# Allegro board brd_tilebridge.brd
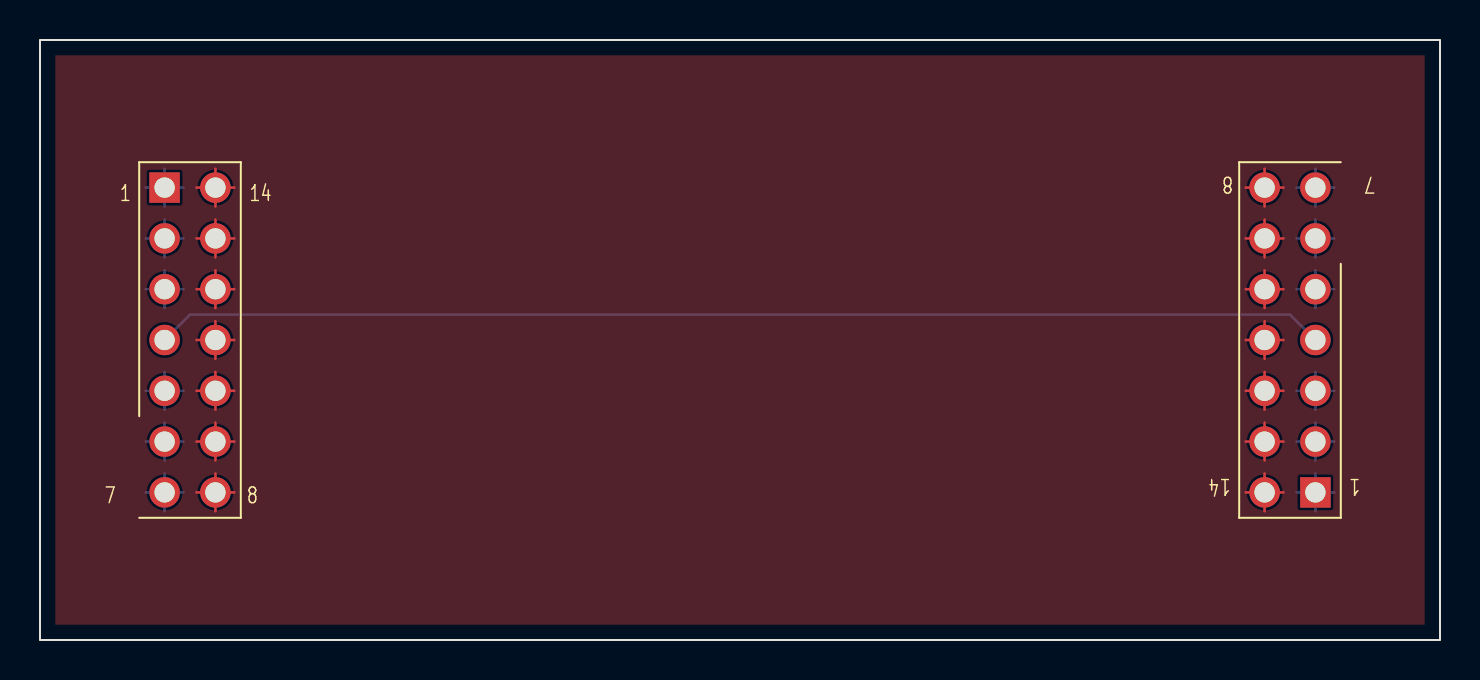
[diagram p0: board, top side]
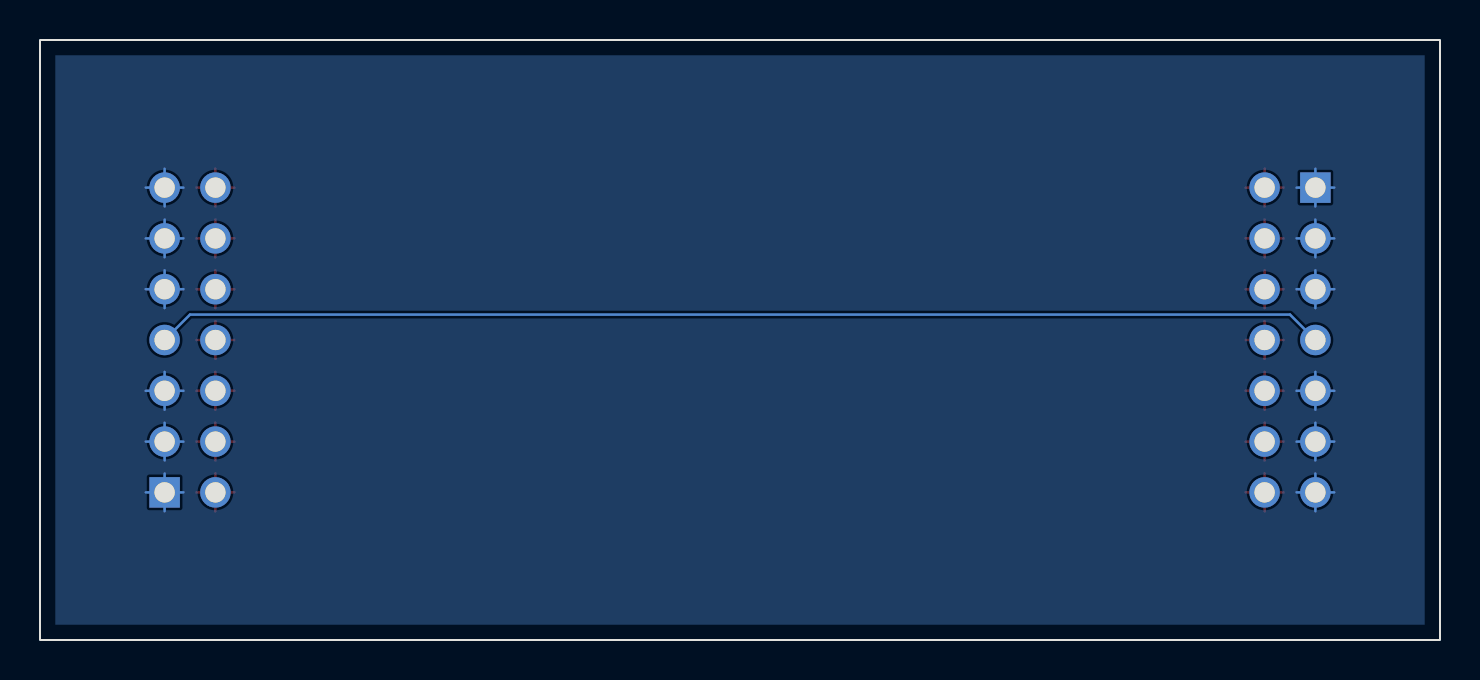
[diagram p1: board, bottom side, seen from below]

Outline 70 x 30 mm; copper layers: TOP, BOTTOM. Coordinates in mm from the lower left corner of the outline.
Outline path: rectangle 0,0 70,30

## Design rules (mm)
constraint set DEFAULT: min track width 0.127

## Placement (name value [footprint] x y rotation side)
J1  conn-generic-2x7  [HDR2X7]  7.5 15 0 top
J2  conn-generic-2x7  [HDR2X7]  62.5 15 180 top

## Library data of the parts
J1 J2 = CONN-GENERIC-2X5_0

## Footprints (pads in the part's own frame, mm; a bottom-side part is the same pattern mirrored in y, then rotated)
HDR2X7
  rect 1.524x1.524 hole 1.016: 1(-1.27,7.62)
  round 1.524 hole 1.016: 2(-1.27,5.08) 3(-1.27,2.54) 4(-1.27,0) 5(-1.27,-2.54) 6(-1.27,-5.08) 7(-1.27,-7.62) 8(1.27,-7.62) 9(1.27,-5.08) 10(1.27,-2.54) 11(1.27,0) 12(1.27,2.54) 13(1.27,5.08) 14(1.27,7.62)

## Nets
GND: J1.1 J1.2 J1.3 J1.5(9) J1.6 J1.7 J2.1 J2.2 J2.3 J2.5(9) J2.6 J2.7
DATA_A: J1.4 J2.4
MAIN_PWR: J1.8 J1.9 J1.10 J1.11 J1.12 J1.13 J1.14 J2.8 J2.9 J2.10 J2.11 J2.12 J2.13 J2.14

## Routing (per net, layer and track width the routed paths; a pad name or vN(x,y) marks a point on that pad's centre or on a via; arc(x,y) is an arc through that point)
GND: length 45.2
  BOTTOM w0.127: J2.1 63.77,8.32 ; J2.1 62.83,7.38 ; J2.1 64.71,7.38 ; J2.1 63.77,6.44 ; J2.6 63.77,21.02 ; J2.6 62.83,20.08 ; J2.6 63.77,19.14 ; J2.6 64.71,20.08 ; 6.23,16.6 J1.3 ; J1.3 5.29,17.54 ; J1.3 7.17,17.54 ; J1.3 6.23,18.48 ; J1.7 7.17,7.38 ; J1.7 6.23,8.32 ; J1.7 5.29,7.38 ; J1.7 6.23,6.44 ; J2.2 64.71,9.92 ; J2.2 63.77,10.86 ; J2.2 63.77,8.98 ; J2.2 62.83,9.92 ; J2.7 64.71,22.62 ; J2.7 63.77,21.68 ; J2.7 62.83,22.62 ; J2.7 63.77,23.56 ; 62.83,17.54 J2.5 ; J2.5 63.77,16.6 ; J2.5 63.77,18.48 ; J2.5 64.71,17.54 ; 6.23,19.14 J1.2 ; J1.2 7.17,20.08 ; J1.2 5.29,20.08 ; J1.2 6.23,21.02 ; 5.29,12.46 J1.5 ; J1.5 6.23,11.52 ; J1.5 7.17,12.46 ; J1.5 6.23,13.4 ; J1.1 7.17,22.62 ; J1.1 5.29,22.62 ; J1.1 6.23,23.56 ; J1.1 6.23,21.68 ; 6.23,8.98 J1.6 ; J1.6 6.23,10.86 ; J1.6 7.17,9.92 ; J1.6 5.29,9.92 ; J2.3 64.71,12.46 ; J2.3 63.77,13.4 ; J2.3 62.83,12.46 ; J2.3 63.77,11.52
DATA_A: length 58.6
  BOTTOM w0.127: J1.4 7.5,16.27 62.5,16.27 J2.4
MAIN_PWR: length 52.8
  TOP w0.127: J2.8 62.17,22.62 ; J2.8 61.23,21.68 ; J2.8 61.23,23.56 ; J2.8 60.29,22.62 ; 8.77,11.52 J1.10 ; J1.10 9.71,12.46 ; J1.10 8.77,13.4 ; J1.10 7.83,12.46 ; 7.83,22.62 J1.14 ; J1.14 8.77,23.56 ; J1.14 8.77,21.68 ; J1.14 9.71,22.62 ; 7.83,9.92 J1.9 ; J1.9 8.77,8.98 ; J1.9 9.71,9.92 ; J1.9 8.77,10.86 ; J1.11 8.77,15.94 ; J1.11 8.77,14.06 ; J1.11 7.83,15 ; J1.11 9.71,15 ; 61.23,14.06 J2.11 ; J2.11 61.23,15.94 ; J2.11 62.17,15 ; J2.11 60.29,15 ; 60.29,12.46 J2.12 ; J2.12 61.23,13.4 ; J2.12 61.23,11.52 ; J2.12 62.17,12.46 ; J1.8 8.77,8.32 ; J1.8 8.77,6.44 ; J1.8 7.83,7.38 ; J1.8 9.71,7.38 ; J2.14 62.17,7.38 ; J2.14 60.29,7.38 ; J2.14 61.23,6.44 ; J2.14 61.23,8.32 ; 60.29,17.54 J2.10 ; J2.10 61.23,18.48 ; J2.10 62.17,17.54 ; J2.10 61.23,16.6 ; 60.29,9.92 J2.13 ; J2.13 61.23,10.86 ; J2.13 62.17,9.92 ; J2.13 61.23,8.98 ; J1.12 9.71,17.54 ; J1.12 8.77,18.48 ; J1.12 8.77,16.6 ; J1.12 7.83,17.54 ; J1.13 9.71,20.08 ; J1.13 7.83,20.08 ; J1.13 8.77,21.02 ; J1.13 8.77,19.14 ; 61.23,19.14 J2.9 ; J2.9 62.17,20.08 ; J2.9 61.23,21.02 ; J2.9 60.29,20.08

## Copper pours and planes (outline as drawn; the poured copper is in the pictures)
GND on BOTTOM: 0.76,29.24 69.24,29.24 69.24,0.76 0.76,0.76
MAIN_PWR on TOP: 0.76,29.24 69.24,29.24 69.24,0.76 0.76,0.76
